# Altium PCB PCB2.PcbDoc
Units mm, origin at the board's own origin, x right, y up, seen from the top; angles counter-clockwise.
Board outline 80.01 x 49.78 mm, 2 copper layers (Top Layer, Bottom Layer); 10 components, 7 nets, 20 pads, 0 vias.
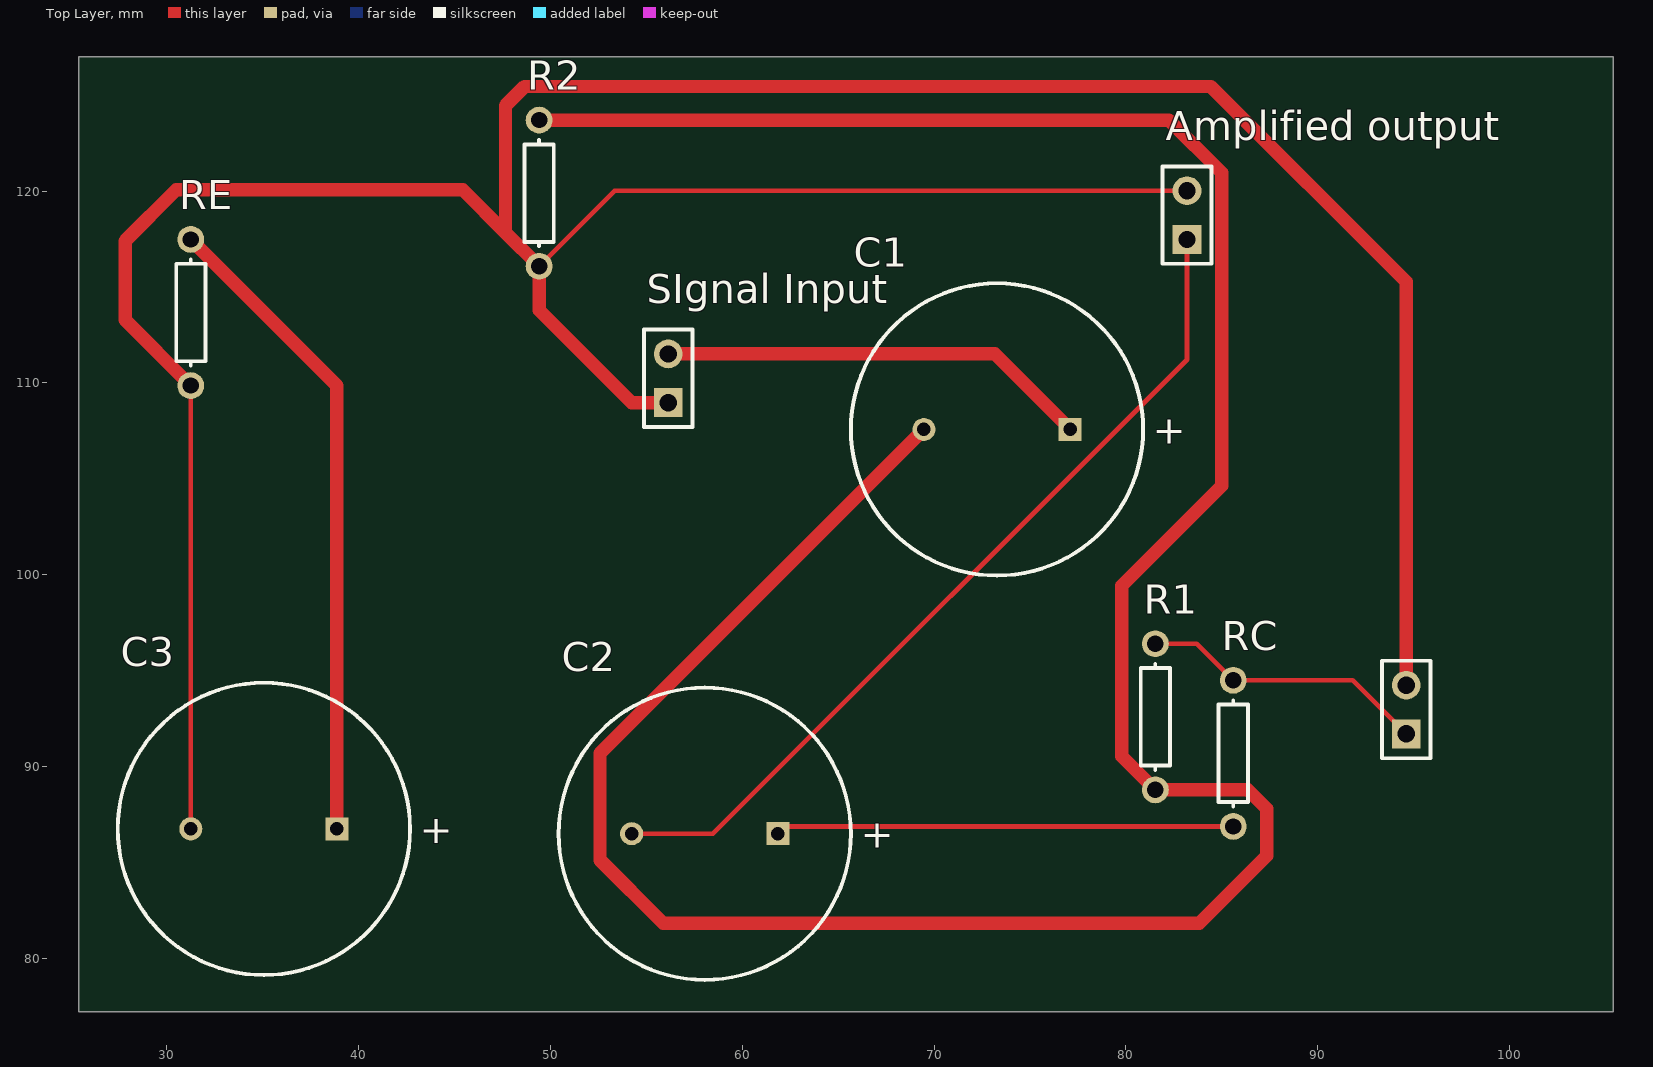
[diagram p0: Top Layer view]
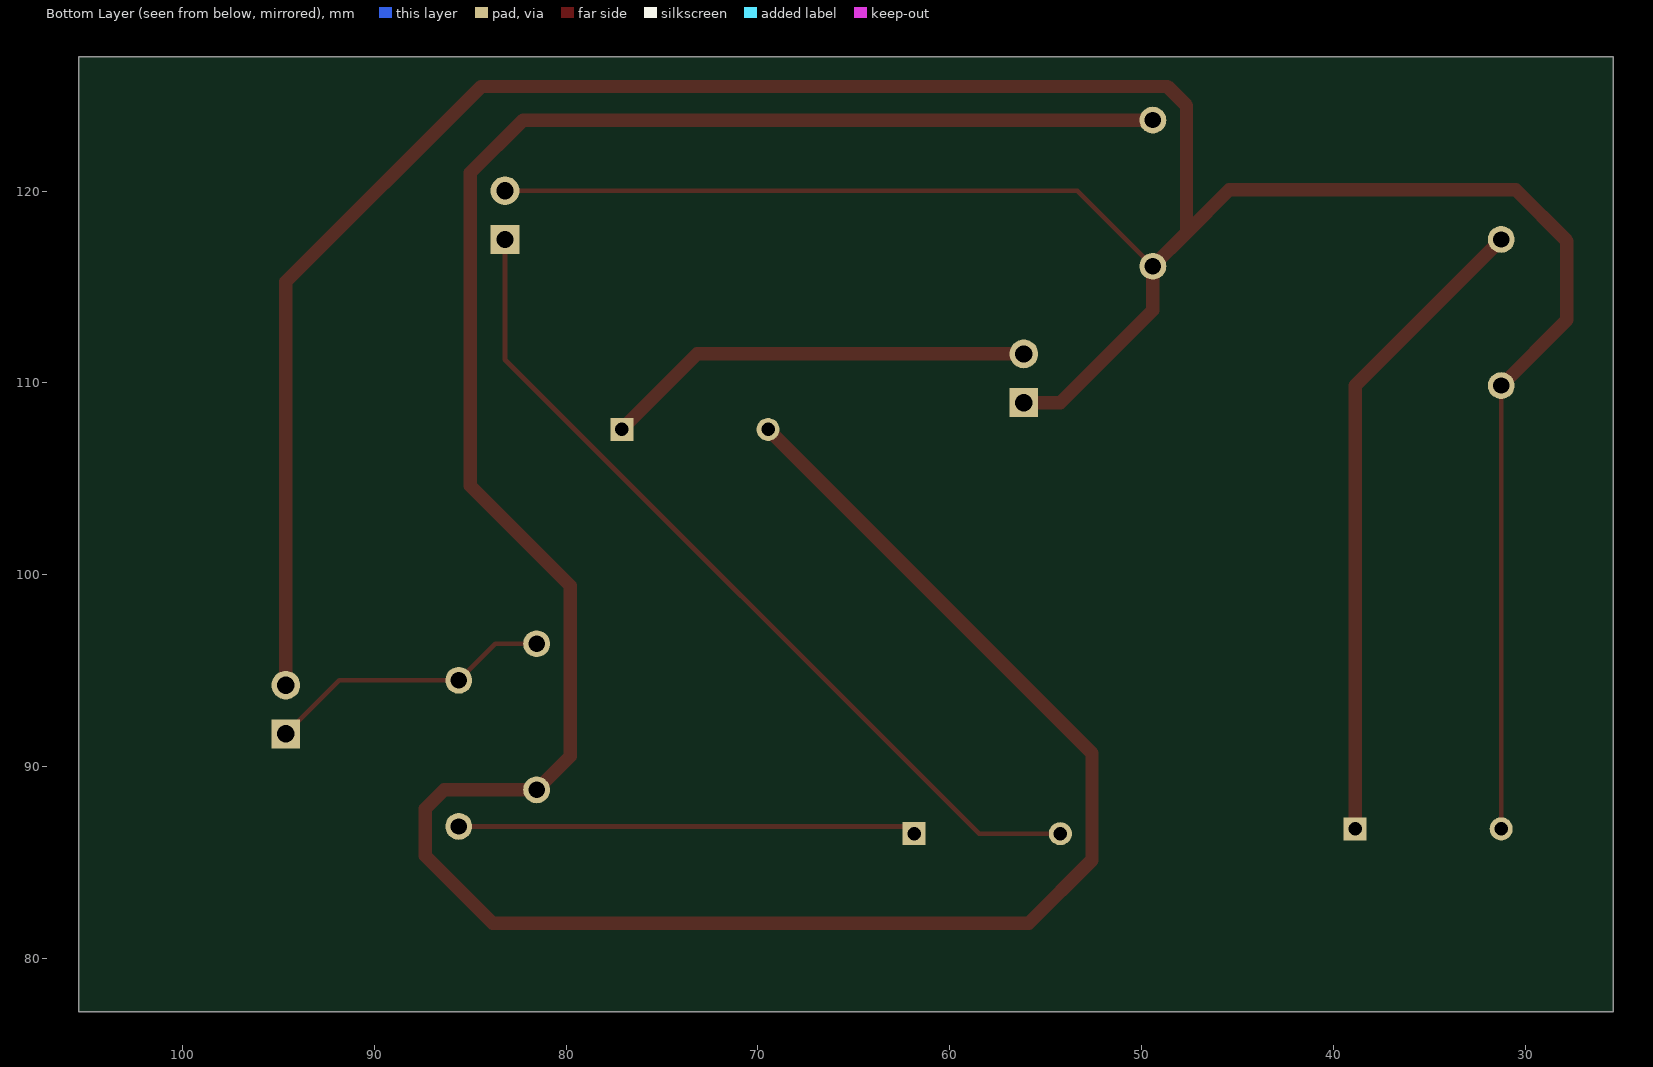
[diagram p1: Bottom Layer view, seen from below]

## Layer stack, top to bottom
Top Solder: solder mask 0.0102, Solder Resist, Dk 3.5
Top Layer: signal copper 0.0356
Dielectric 1: dielectric 0.32, FR-4, Dk 4.8
Bottom Layer: signal copper 0.0356
Bottom Solder: solder mask 0.0102, Solder Resist, Dk 3.5

## Board outline
25.4,77.216 105.41,77.216 105.41,127 25.4,127

## Design rules (kind name [scope] priority, off if disabled: settings)
Clearance [All] p1: gap=0.7 ignorepadtopadclearanceinfootprint=FALSE
PolygonConnect [All] p1: connectstyle=Direct reliefconductorwidth=0.254 reliefentries=4 polygonreliefangle="90 Angle" airgapwidth=0.254
RoomDefinition Sheet1 [InComponentClass('Sheet1')] p1: confinementstyle=ConfineIn formatcopy=TRUE lockcomponents=FALSE outline 25.781,77.47 105.41,77.47 105.41,126.873 25.781,126.873
RoutingLayers [All] p1: top layer_v5=TRUE bottom layer_v5=FALSE
RoutingVias [All] p1: holewidth=0.711 width=1.27 viastyle="Through Hole" minholewidth=0.711 minwidth=1.27 maxholewidth=0.711 maxwidth=1.27
SolderMaskExpansion [All] p1: expansion=0.102 istentingtop=FALSE
Width [All] p1: maxlimit=0.8 minlimit=0.6 preferedwidth=0.7
29 further rules are at their usual default settings.

## Components (designator, comment, footprint, x,y, rotation, side; value= is the part's Value field where it differs from the comment)
"Amplified output" "Header 2" HDR1X2 83.185,117.475 r90 top
C1 "Cap Pol1" RB7.6-15 73.279,107.569 r0 top value=10mu
C2 "Cap Pol1" RB7.6-15 58.039,86.487 r0 top value=10mu
C3 "Cap Pol1" RB7.6-15 35.052,86.741 r0 top value=100mu
R1 "" AXIAL-0.3 81.534,92.583 r90 top value=10K
R2 "" AXIAL-0.3 49.403,119.888 r90 top value=2.2K
RC "" AXIAL-0.3 85.598,90.678 r90 top value=4.7K
RE "" AXIAL-0.3 31.242,113.665 r90 top value=1K
"SIgnal Input" "Header 2" HDR1X2 56.134,108.966 r90 top
? "Header 2" HDR1X2 94.615,91.694 r90 top

## Footprints (in the part's own frame and the unit in brackets; to place one, negate y for a bottom-side part, rotate by r counter-clockwise, add the part's x,y. Pads: shape width x height; smd on the part's side, far side on the other; paste and mask are expansions set on the pad)
AXIAL-0.3 [mm] "Axial Device, Thru-Hole; 2 Leads; 0.3 in Pin Spacing"
  round 1.4 hole 0.85: 1(-3.81,0) 2(3.81,0)
  silkscreen extent -2.77,-0.76 2.77,0.76
HDR1X2 [mm] "Connector; Header; 2 Position"
  rect 1.5x1.5 hole 0.9: 1(0,0)
  round 1.5 hole 0.9: 2(2.54,0)
  silkscreen extent -1.27,-1.27 3.81,1.27
RB7.6-15 [mm] "Polarized Capacitor (Radial); 2 Leads"
  rect 1.2x1.2 hole 0.7: 1(3.81,0)
  round 1.2 hole 0.7: 2(-3.81,0)
  silkscreen extent -7.62,-7.62 7.62,7.62

## Part data
"Amplified output" "SIgnal Input" ?: "Header, 2-Pin", LatestRevisionDate=17-Jul-2002, LatestRevisionNote="Re-released for DXP Platform.", Publisher="Altium Limited"
C1 C2 C3: "Polarized Capacitor (Radial)", LatestRevisionDate=17-Jul-2002, LatestRevisionNote="Re-released for DXP Platform.", PackageDescription="Polarized Capacitor (Radial); 2 Leads", PackageReference=RB7.6-15, Published=8-Jun-2000, Publisher="Altium Limited"
R1 R2 RC RE: library part Res1, "Resistor", LatestRevisionDate=17-Jul-2002, LatestRevisionNote="Re-released for DXP Platform.", PackageDescription="Axial Device, Thru-Hole; 2 Leads; 0.3 in Pin Spacing", PackageReference=AXIAL-0.3, Published=8-Jun-2000, Publisher="Altium Limited"

## Nets (pads, with @x,y where several pads share a name; then routed paths per layer and width w, separated by ;. In a path a pad name is that pad's centre, name@x,y a point inside that pad or via, vN(x,y) a via of type N, cw(c..) or ccw(c..) an arc to the next point about the centre after c; other vN are vias at no path point)
GND: "Amplified output.2" "SIgnal Input.1" ?.2 C3.2 R2.1 RE.1 | length 182.1
  Top Layer w0.254: C3.2 RE.1 ; R2.1 53.34,120.015 83.185,120.015
  Top Layer w0.7: RE.1 27.813,113.284 27.813,117.391 30.48,120.058 45.423,120.058 47.65,117.831 ; 56.134,108.966 54.229,108.966 49.403,113.792 R2.1 47.65,117.831 ; ?.2 94.615,115.265 84.43,125.451 48.641,125.451 47.65,124.46 47.65,117.831
"NetAmplified output_1": "Amplified output.1" C2.2 | length 45.5
  Top Layer w0.254: C2.2 58.464,86.487 83.185,111.208 83.185,117.475
NetAmplifier_1: C2.1 RC.1 | length 23.9
  Top Layer w0.254: C2.1 62.23,86.868 RC.1
NetAmplifier_2: C1.2 R1.1 R2.2 | length 147.5
  Top Layer w0.7: R2.2 82.245,123.698 84.988,120.955 84.988,104.623 79.781,99.416 79.781,90.526 R1.1 86.36,88.773 87.351,87.782 87.351,85.344 83.82,81.813 55.88,81.813 52.578,85.115 52.578,90.678 C1.2
NetAmplifier_3: C3.1 RE.2 | length 33.9
  Top Layer w0.7: RE.2 38.862,109.855 C3.1
NetC1_1: "SIgnal Input.2" C1.1 | length 22.6
  Top Layer w0.7: 56.134,111.506 73.152,111.506 C1.1
VCC: ?.1 R1.2 RC.2 | length 15
  Top Layer w0.254: R1.2 83.693,96.393 RC.2 91.821,94.488 ?.1

## Text inside footprints (layer, text, board x,y; h text height)
C1: Top Overlay "+" at 81.411,106.832 h1.5
C2: Top Overlay "+" at 66.171,85.75 h1.5
C3: Top Overlay "+" at 43.184,86.004 h1.5